# Altium PCB DS137-1.0-C二氧化硫传感器.PcbDoc
Units mm, origin at the board's own origin, x right, y up, seen from the top; angles counter-clockwise.
Board outline 17.5 x 17.5 mm, 2 copper layers (Top Layer, Bottom Layer); 14 components, 13 nets, 40 pads, 12 vias.
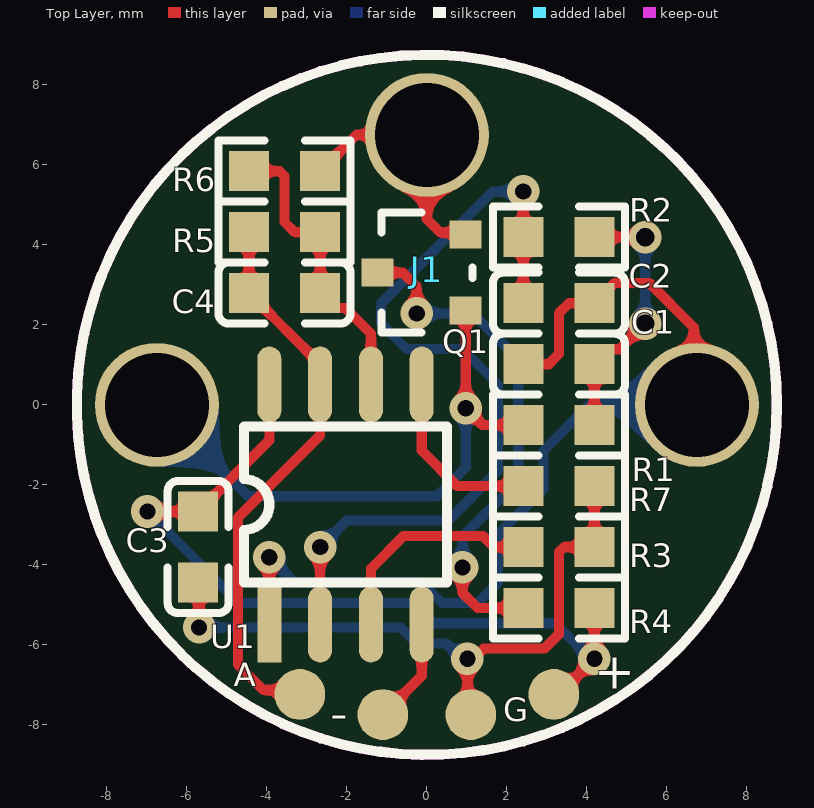
[diagram p0: Top Layer view]
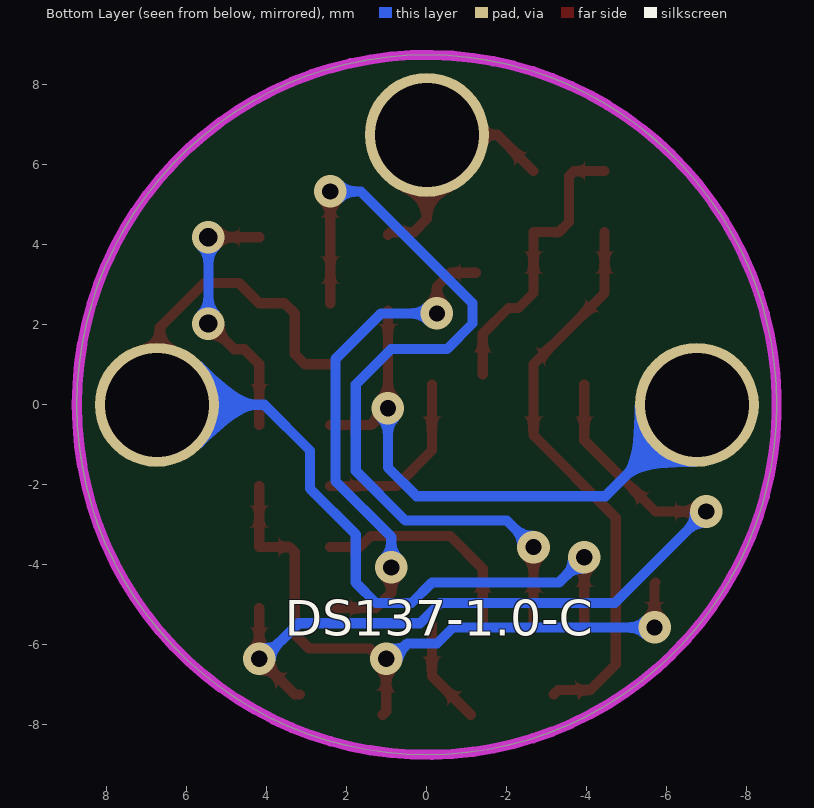
[diagram p1: Bottom Layer view, seen from below]
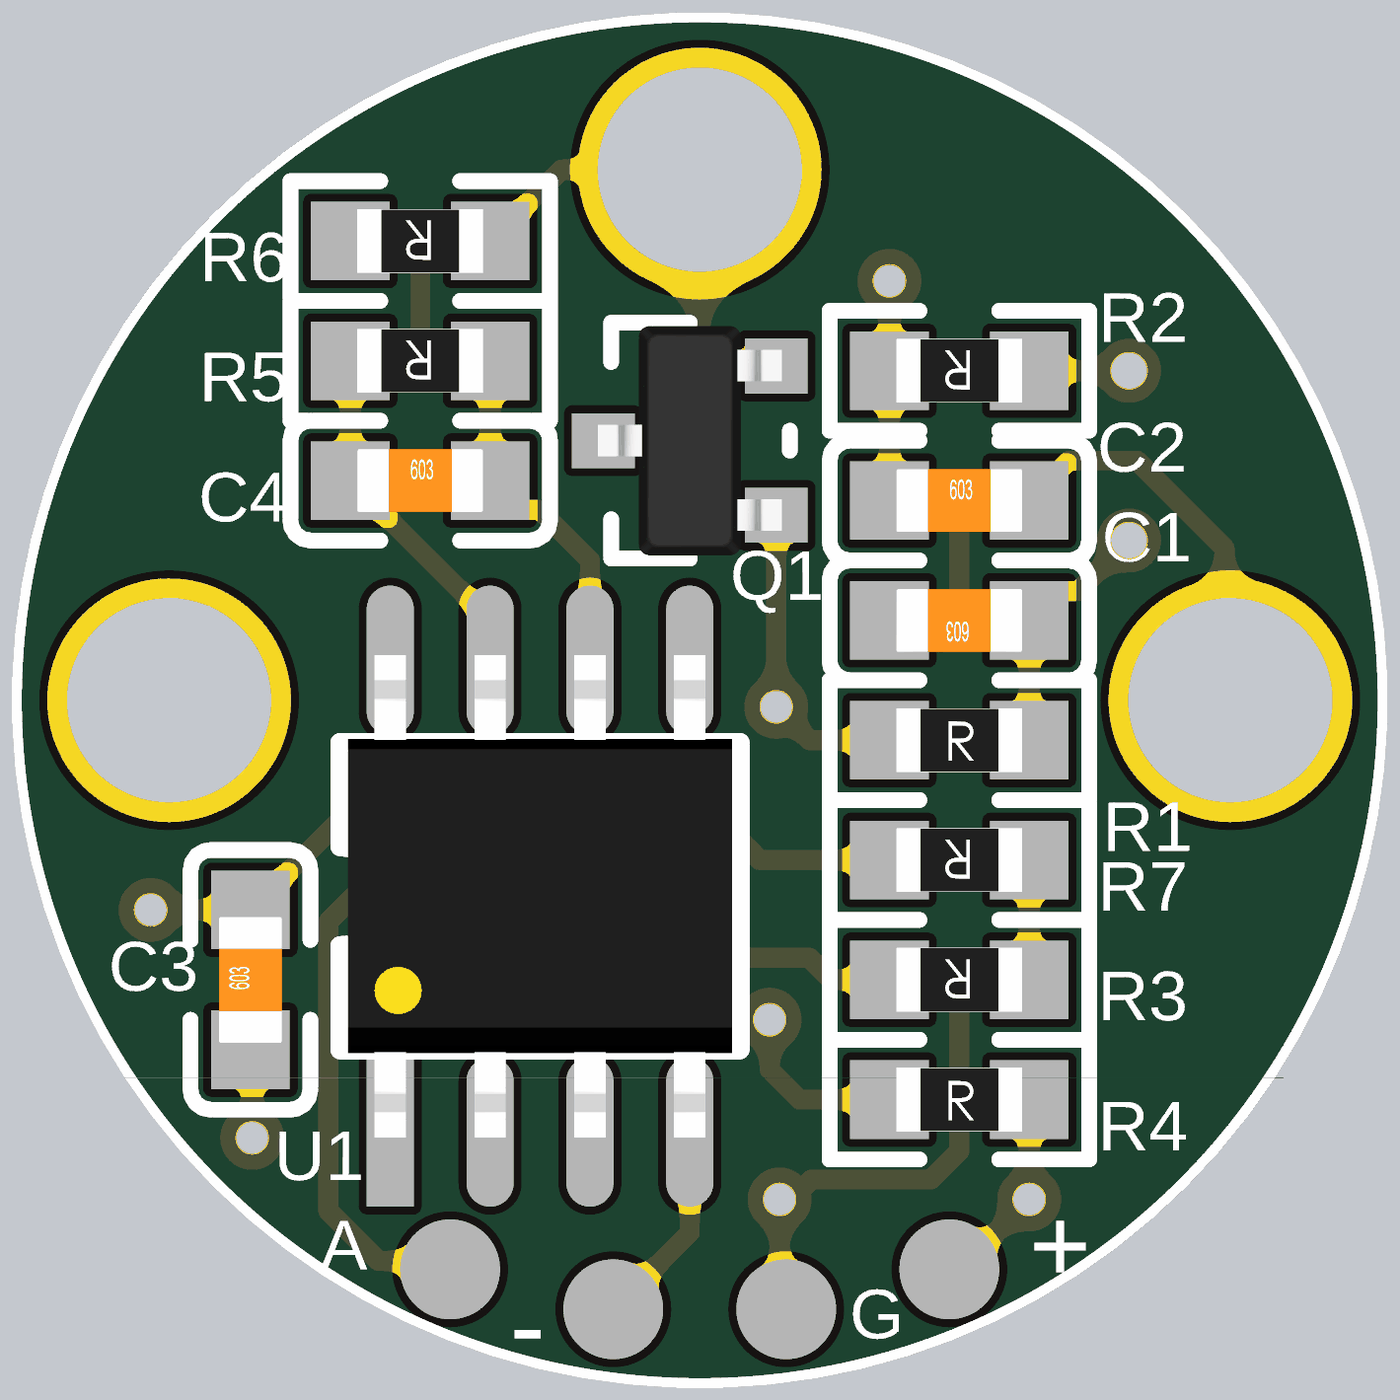
[diagram p2: 3D render of the assembled board from above, using the file's embedded part models]

## Layer stack, top to bottom
Top Solder: solder mask 0.0102, Solder Resist, Dk 3.5
Top Layer: signal copper 0.0356
Dielectric 1: dielectric 0.32, FR-4, Dk 4.8
Bottom Layer: signal copper 0.0356
Bottom Solder: solder mask 0.0102, Solder Resist, Dk 3.5

## Board outline
-8.75,0 ccw(c0,0) 0,-8.75 ccw(c0,0) 8.75,0 ccw(c0,0) 0,8.75 ccw(c0,0)

## Design rules (kind name [scope] priority, off if disabled: settings)
Clearance [All] p1: gap=0.254 ignorepadtopadclearanceinfootprint=FALSE except(0: Arc-Hole Track-Hole SMDPad-Hole THPad-Hole Via-Hole Fill-Hole Poly-Hole Region-Hole Text-Hole)
PolygonConnect [All] p1: connectstyle=Relief reliefconductorwidth=0.254 reliefentries=4 polygonreliefangle="90 Angle" airgapwidth=0.254
RoutingVias [All] p1: holewidth=0.711 width=1.27 viastyle="Through Hole" minholewidth=0.711 minwidth=1.27 maxholewidth=0.711 maxwidth=1.27
SolderMaskExpansion [All] p1: expansion=0.102 istentingtop=FALSE
Width [All] p1: maxlimit=0.254 minlimit=0.254 preferedwidth=0.254
30 further rules are at their usual default settings.

## Components (designator, comment, footprint, x,y, rotation, side; value= is the part's Value field where it differs from the comment)
C1 "SMDCAP00010" 0603CAP 3.302,1.016 r180 top value=10nF
C2 "SMDCAP00008" 0603CAP 3.302,2.54 r0 top value=1nF
C3 "SMDCAP00013" 0603CAP -5.715,-3.557 r90 top value=100nF
C4 "SMDCAP00010" 0603CAP -3.556,2.794 r0 top value=10nF
J1 "SL000000042" 3_Electrode 0,0 r0 top locked value=三电极传感器
Q1 "MMBFJ177LT1G" SOT23 -0.127,3.302 r90 top
R1 "SMDRES00056" 0603RES 3.302,-0.508 r0 top value=10K
R2 "SMDRES00056" 0603RES 3.302,4.191 r180 top value=10K
R3 "SMDRES00056" 0603RES 3.302,-3.556 r180 top value=10K
R4 "SMDRES00085" 0603RES 3.302,-5.08 r0 top value=1M
R5 "Chip 27K 1/10W ±0.1％ 0603" 0603RES -3.556,4.318 r180 top value="27K ±0.1%"
R6 "SMDRES00005" 0603RES -3.556,5.842 r180 top value=10R
R7 "SMDRES00056" 0603RES 3.302,-2.032 r180 top value=10K
U1 "OPA2192" SO-8 -2.032,-2.492 r90 top

## Footprints (in the part's own frame and the unit in brackets; to place one, negate y for a bottom-side part, rotate by r counter-clockwise, add the part's x,y. Pads: shape width x height; smd on the part's side, far side on the other; paste and mask are expansions set on the pad)
3_Electrode [mm]
  round 3.1 hole 2.6: 1(6.75,0) 2(-6.75,0) 3(0,6.75)
  silkscreen extent -8.75,-8.75 8.75,8.75
0603CAP [mm]
  rect 1x1 smd: 1(-0.889,0) 2(0.89,0)
  silkscreen extent -1.65,-0.76 1.65,0.76, body extent -0.8,-0.4 0.8,0.4, height 0.3
0603RES [mm]
  rect 1x1 smd: 1(-0.889,0) 2(0.889,0)
  silkscreen extent -1.65,-0.76 1.65,0.76, body extent -0.8,-0.41 0.8,0.41, height 0.51
SO-8 [mm]
  rect 1.9x0.6 smd: 1(-3,1.905)
  oval 1.9x0.6 smd: 2(-3,0.635) 3(-3,-0.635) 4(-3,-1.905) 5(3,-1.905) 6(3,-0.635) 7(3,0.635) 8(3,1.905)
  silkscreen extent -1.95,-2.54 1.95,2.54, body extent -3.07,-2.44 3.07,2.44, height 1.77
SOT23 [mm]
  rect 0.7x0.8 smd: 1(-0.95,-1.1) 2(0.95,-1.1) 3(0,1.1)
  silkscreen extent -1.5,-1.27 1.5,1, body extent -1.46,-1.17 1.46,1.17, height 1

## Part data
C1 C4: library part "MLCC 10nF 50V ±10％ 0603", "贴片电容"
C2: library part "MLCC 1nF 50V ±10％ 0603", "贴片电容"
C3: library part "MLCC 100nF 50V ±10％ 0603", "贴片电容"
J1: library part "DIP3 单排直针 间距2.54mm 针长11mm 铜", "单排直针"
Q1: library part J177, "P沟道JFET 结型场效应管(JFET) 适用于模拟开关和斩波器应用。"
R1 R2 R3 R7: library part "Chip 10K 1/16W ±1％ 0603", "贴片电阻"
R4: library part "Chip 1M 1/16W ±1％ 0603", "贴片电阻"
R6: library part "Chip 10R 1/16W ±1％ 0603", "贴片电阻"
U1: library part TL062C

## Free pads (board coordinates)
  round 1.27 smd: 1(3.175,-7.239) 2(1.1,-7.747) 3(-1.1,-7.747) 4(-3.175,-7.239)

## Via types
v1: diameter 0.813, hole 0.406, Top Layer to Bottom Layer, tented both sides, 10 vias
v2: diameter 0.813, hole 0.457, Top Layer to Bottom Layer, tented both sides, 2 vias

## Nets (pads, with @x,y where several pads share a name; then routed paths per layer and width w, separated by ;. In a path a pad name is that pad's centre, name@x,y a point inside that pad or via, vN(x,y) a via of type N, cw(c..) or ccw(c..) an arc to the next point about the centre after c; other vN are vias at no path point)
GND: C3.1 pad.2 R3.1 R7.1 | length 16.7
  Top Layer w0.254: C3.1 -5.694,-4.467 v1(-5.694,-5.567) ; pad.2 1.016,-7.663 v1(1.016,-6.35) 1.167,-6.35 1.421,-6.096 2.94,-6.096 3.302,-5.734 3.302,-3.683 3.429,-3.556 R3.1 R7.1
  Bottom Layer w0.254: v1(-5.694,-5.567) -0.656,-5.567 -0.254,-5.969 0.484,-5.969 0.865,-6.35 v1(1.016,-6.35)
NetC1_1: C1.1 R1.2 R2.1 | length 6.6
  Top Layer w0.254: R1.2 C1.1 4.564,1.389 4.818,1.389 v2(5.461,2.032) ; R2.1 v2(5.461,4.191)
  Bottom Layer w0.254: v2(5.461,2.032) v2(5.461,4.191)
NetC1_2: C1.2 C2.2 J1.1 U1.1 | length 24.3
  Top Layer w0.254: U1.1 v1(-3.937,-3.81) ; C1.2 3.048,1.016 3.302,1.27 3.302,2.286 3.556,2.54 C2.2 4.7,3.048 5.559,3.048 6.676,1.931 6.676,0.074 J1.1
  Bottom Layer w0.254: v1(-3.937,-3.81) -3.302,-4.445 -0.127,-4.445 0.381,-4.953 1.27,-4.953 1.778,-4.445 1.778,-3.239 2.921,-2.096 2.921,-1.143 4.064,0 J1.1
NetC2_1: C2.1 R2.2 U1.2 | length 20.9
  Top Layer w0.254: U1.2 v1(-2.667,-3.556) ; C2.1 R2.2 v1(2.413,5.334)
  Bottom Layer w0.254: v1(-2.667,-3.556) -2.007,-2.896 0.533,-2.896 1.778,-1.651 1.778,0.508 0.889,1.397 -0.508,1.397 -1.143,2.032 -1.143,2.54 1.651,5.334 v1(2.413,5.334)
NetC4_2: C4.2 R5.1 R6.2 U1.6 | length 7.3
  Top Layer w0.254: R6.2 -3.683,5.842 -3.556,5.715 -3.556,4.572 -3.302,4.318 R5.1 C4.2 -2.293,2.421 -2.04,2.421 -1.397,1.778 U1.6@-1.397,0.762
NetJ1_2: J1.2 Q1.1 R1.1 | length 14.5
  Top Layer w0.254: Q1.1 v1(0.973,-0.084) 1.397,-0.508 R1.1
  Bottom Layer w0.254: J1.2 -4.464,-2.286 0.254,-2.286 0.973,-1.567 v1(0.973,-0.084)
NetJ1_3: J1.3 Q1.2 R6.1 | length 6.3
  Top Layer w0.254: R6.1 -1.759,6.75 J1.3 0,4.645 0.341,4.304 0.921,4.304 Q1.2
NetQ1_3: Q1.3 R4.1 | length 12.9
  Top Layer w0.254: Q1.3 -0.6,3.302 -0.254,2.956 v1(-0.254,2.286) ; v1(0.889,-4.064) 0.889,-4.699 1.27,-5.08 R4.1
  Bottom Layer w0.254: v1(-0.254,2.286) 1.143,2.286 2.286,1.143 2.286,-1.905 0.889,-3.302 v1(0.889,-4.064)
NetR3_2: R3.2 U1.3 | length 5.7
  Top Layer w0.254: U1.3 -1.397,-4.095 -0.578,-3.277 1.397,-3.277 1.676,-3.556 R3.2
NetR7_2: R7.2 U1.5 | length 4.6
  Top Layer w0.254: U1.5 -0.127,-1.143 0.762,-2.032 R7.2
SIG: C4.1 pad.4 R5.2 U1.7 | length 14.3
  Top Layer w0.254: R5.2 C4.1 -2.667,1.016 U1.7 -2.667,-0.762 -4.724,-2.819 -4.724,-6.493 -4.087,-7.131 -3.283,-7.131 pad.4
VCC_5V: C3.2 pad.1 R4.2 U1.8 | length 20.5
  Top Layer w0.254: v1(-6.985,-2.667) C3.2 -3.937,-0.889 U1.8 ; pad.1 3.302,-7.239 v1(4.191,-6.35) R4.2
  Bottom Layer w0.254: v1(-6.985,-2.667) -4.699,-4.953 -0.337,-4.953 0.171,-5.461 3.204,-5.461 4.093,-6.35 v1(4.191,-6.35)
VCC_-5V: pad.3 U1.4 | length 2.7
  Top Layer w0.254: pad.3 -0.127,-6.774 U1.4

## Keep-outs
Keep-Out Layer:
  circle w0.254: c0,0 r8.75

## Other copper
Top Layer:
  pour cut-out: 4.945,4.945 3.078,4.945 2.794,-5.842 3.614,-5.834 3.683,3.302 4.314,3.31 4.953,4.191
  pour cut-out: -1.651,6.985 -4.953,6.985 -5.461,6.477 -5.461,2.159 -4.953,1.651 -2.032,1.651 -1.905,1.524 -1.905,-0.381 -1.778,-0.508 -1.016,-0.508 -0.889,-0.381 -0.889,2.286 -1.524,2.921 -1.524,6.858
Bottom Layer:
  pour cut-out: -1.651,6.985 -4.953,6.985 -5.461,6.477 -5.461,2.159 -4.953,1.651 -2.032,1.651 -1.905,1.524 -1.905,-0.381 -1.778,-0.508 -1.016,-0.508 -0.889,-0.381 -0.889,2.286 -1.524,2.921 -1.524,6.858

## Silkscreen, mask and mechanical layers (free items; w line width, h text height)
Top Overlay:
  text "A" at -4.826,-7.239 h1.02
  text "+" at 4.191,-7.397 h1.52
  text "G" at 1.905,-8.117 h1.02
  text "-" at -2.413,-8.421 h1.52
Bottom Overlay:
  text "DS137-1.0-C" at 3.556,-6.078 h1.52
Mechanical 1:
  circle w0.254: c0,0 r8.75